# EAGLE board buildPlatform (EAGLE 6.3)
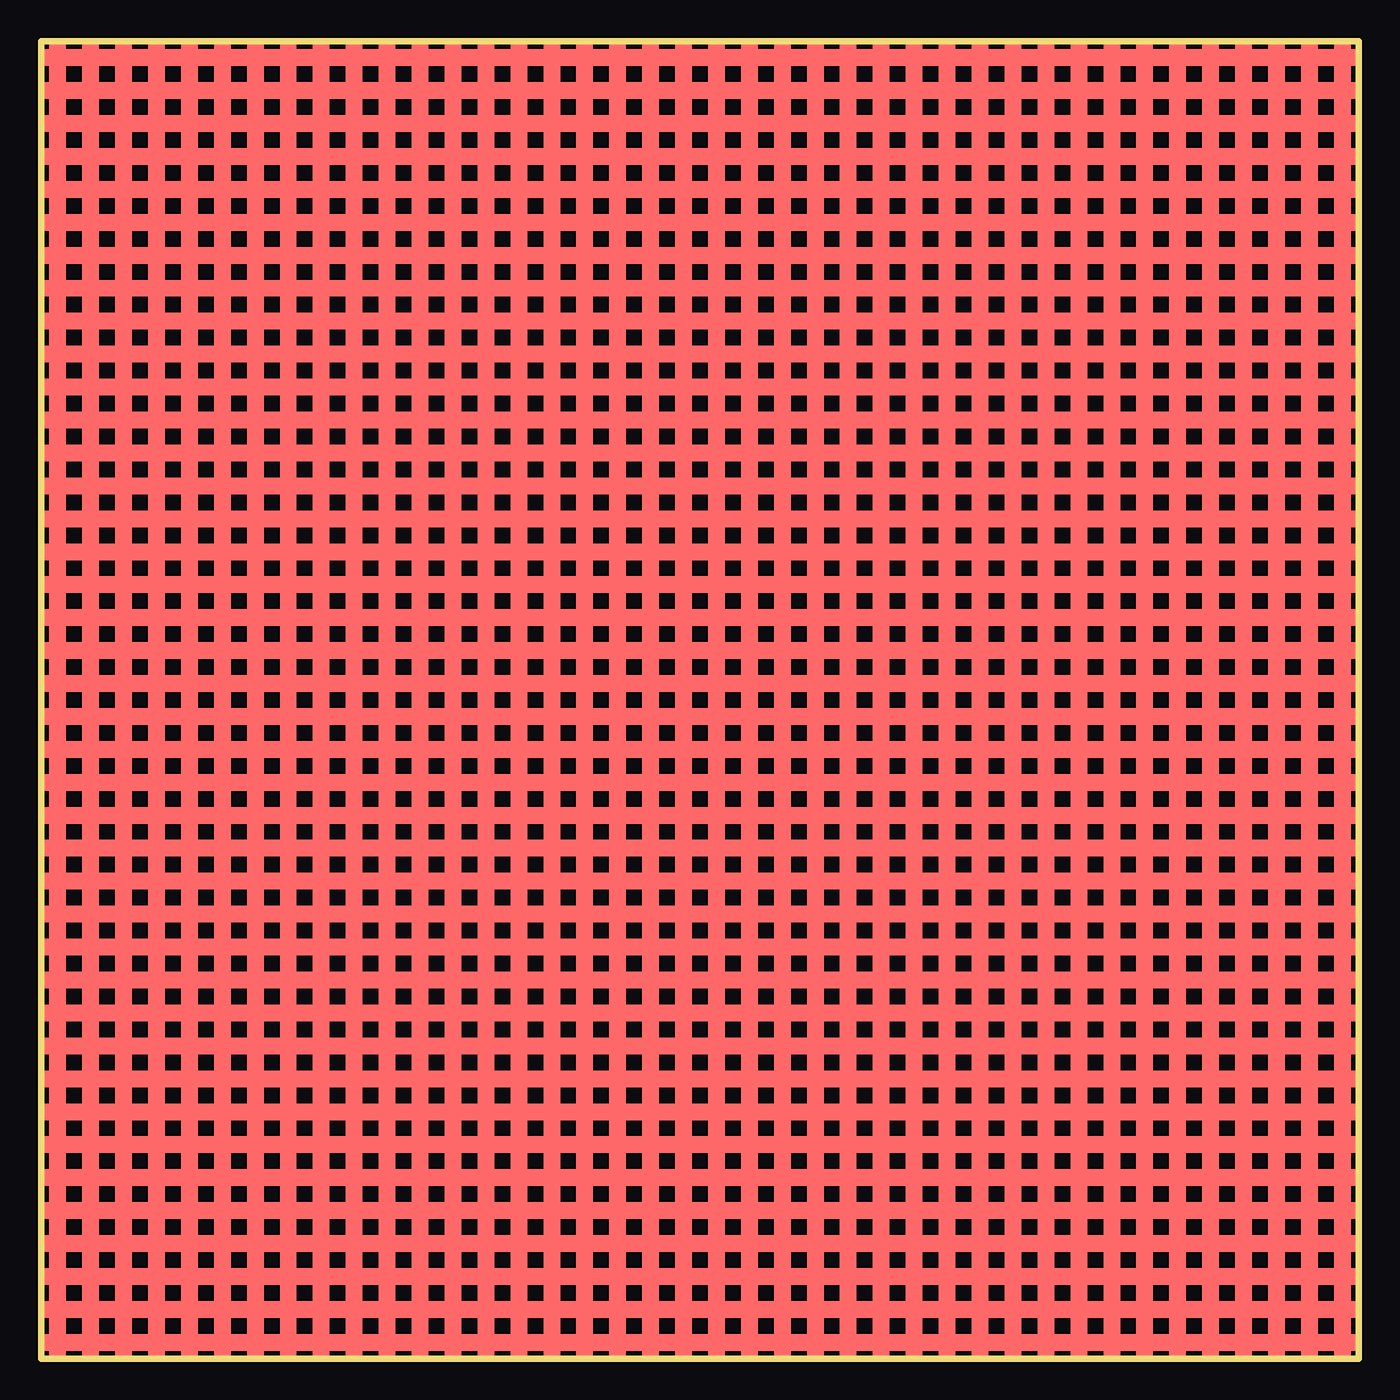
[diagram p0: board, top side]
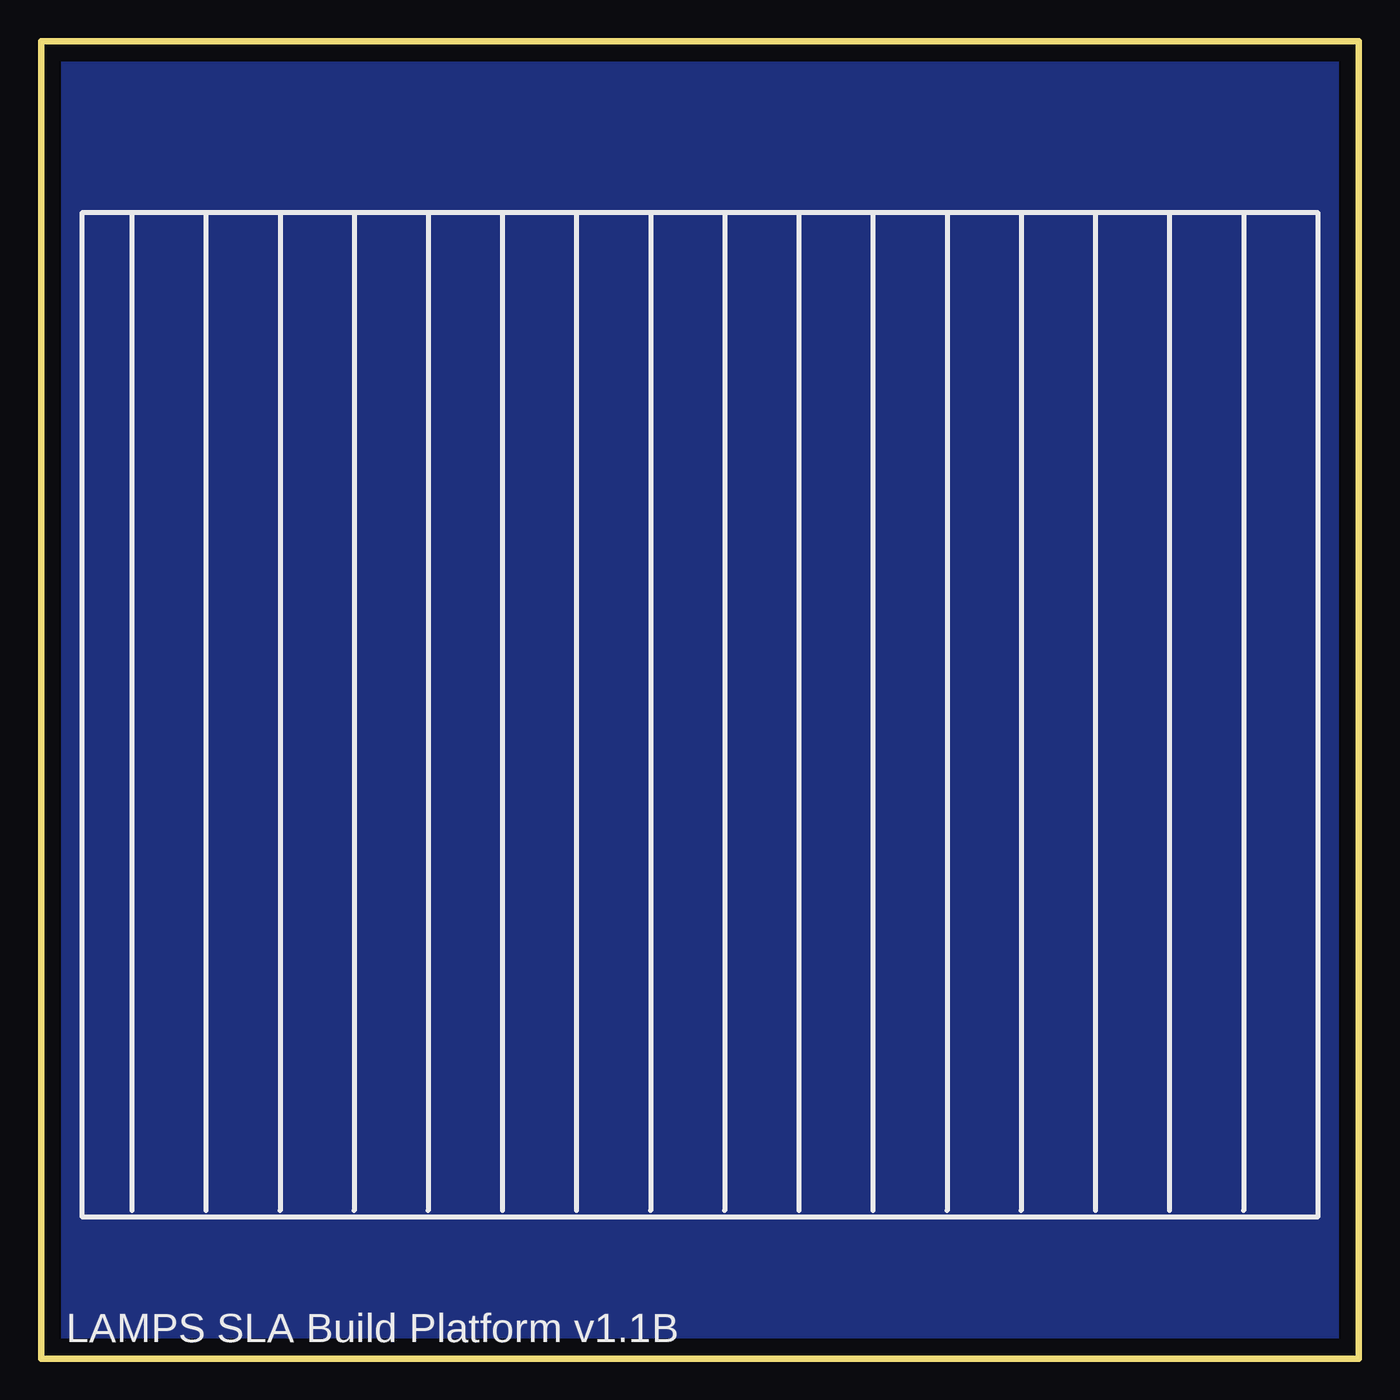
[diagram p1: board, bottom side, seen from below]

Size 80 x 80 mm. Coordinates in mm from the lower left corner, seen from the top.
Outline: 0,0 80,0 80,80 0,80 0,0
Copper layers (1*16): Top 0.035mm / dielectric 1.5mm / Bottom 0.035mm
Design rules "default": minimum track width 10mil, minimum drill 24mil, track to track 8mil, track to pad 8mil, pad to pad 8mil, via to via 8mil, smd to smd 8mil, copper to edge 40mil, drill to drill 8mil, minimum pad ring 10mil, minimum via ring 8mil, stop-mask expansion 4mil, vias tented up to drill 0mil, thermal gap 10mil

## Footprints (pad centres in the part's own frame; a part is rotated, then mirrored left to right if it is on the bottom)
HOTPAD = smd 80 x 1: P$2 40,2; P$3 40,4; P$4 40,6; P$5 40,8; P$6 40,10; P$7 40,12; P$8 40,14; P$9 40,16; P$10 40,18; P$11 40,20; P$12 40,22; P$13 40,24; P$14 40,26; P$15 40,28; P$16 40,30; P$17 40,32; P$18 40,34; P$19 40,36; P$20 40,38; P$21 40,40; P$22 40,42; P$23 40,44; P$24 40,46; P$25 40,48; P$26 40,50; P$27 40,52; P$28 40,54; P$29 40,56; P$30 40,58; P$31 40,60; P$32 40,62; P$33 40,64; P$34 40,66; P$35 40,68; P$36 40,70; P$37 40,72; P$38 40,74; P$39 40,76; P$40 40,78; P$41 40,80

## Placement (x,y rotation side)
E$1  [HOTPAD]  0,-1 0 top
E$2  [HOTPAD]  81,0 90 top

## Library data of the parts
E$1 E$2 = hotpad

## Tracks (layer width: path | path; a pad name or v marks a point on that pad's centre or on a via)
GND
  pour Bottom: 0,80 80,80 80,0 0,0

## Text on the board
bPlace: LAMPS SLA Build Platform v1.1B